# Altium PCB 3043-1-1532.PcbDoc (part 1 of 2)
Units mm, origin at the board's own origin, x right, y up, seen from the top; angles counter-clockwise.
Board outline 82.5 x 82.18 mm, 4 copper layers (Top Layer, Mid-Layer 1, Mid-Layer 2, Bottom Layer); 178 components, 120 nets, 547 pads, 246 vias.
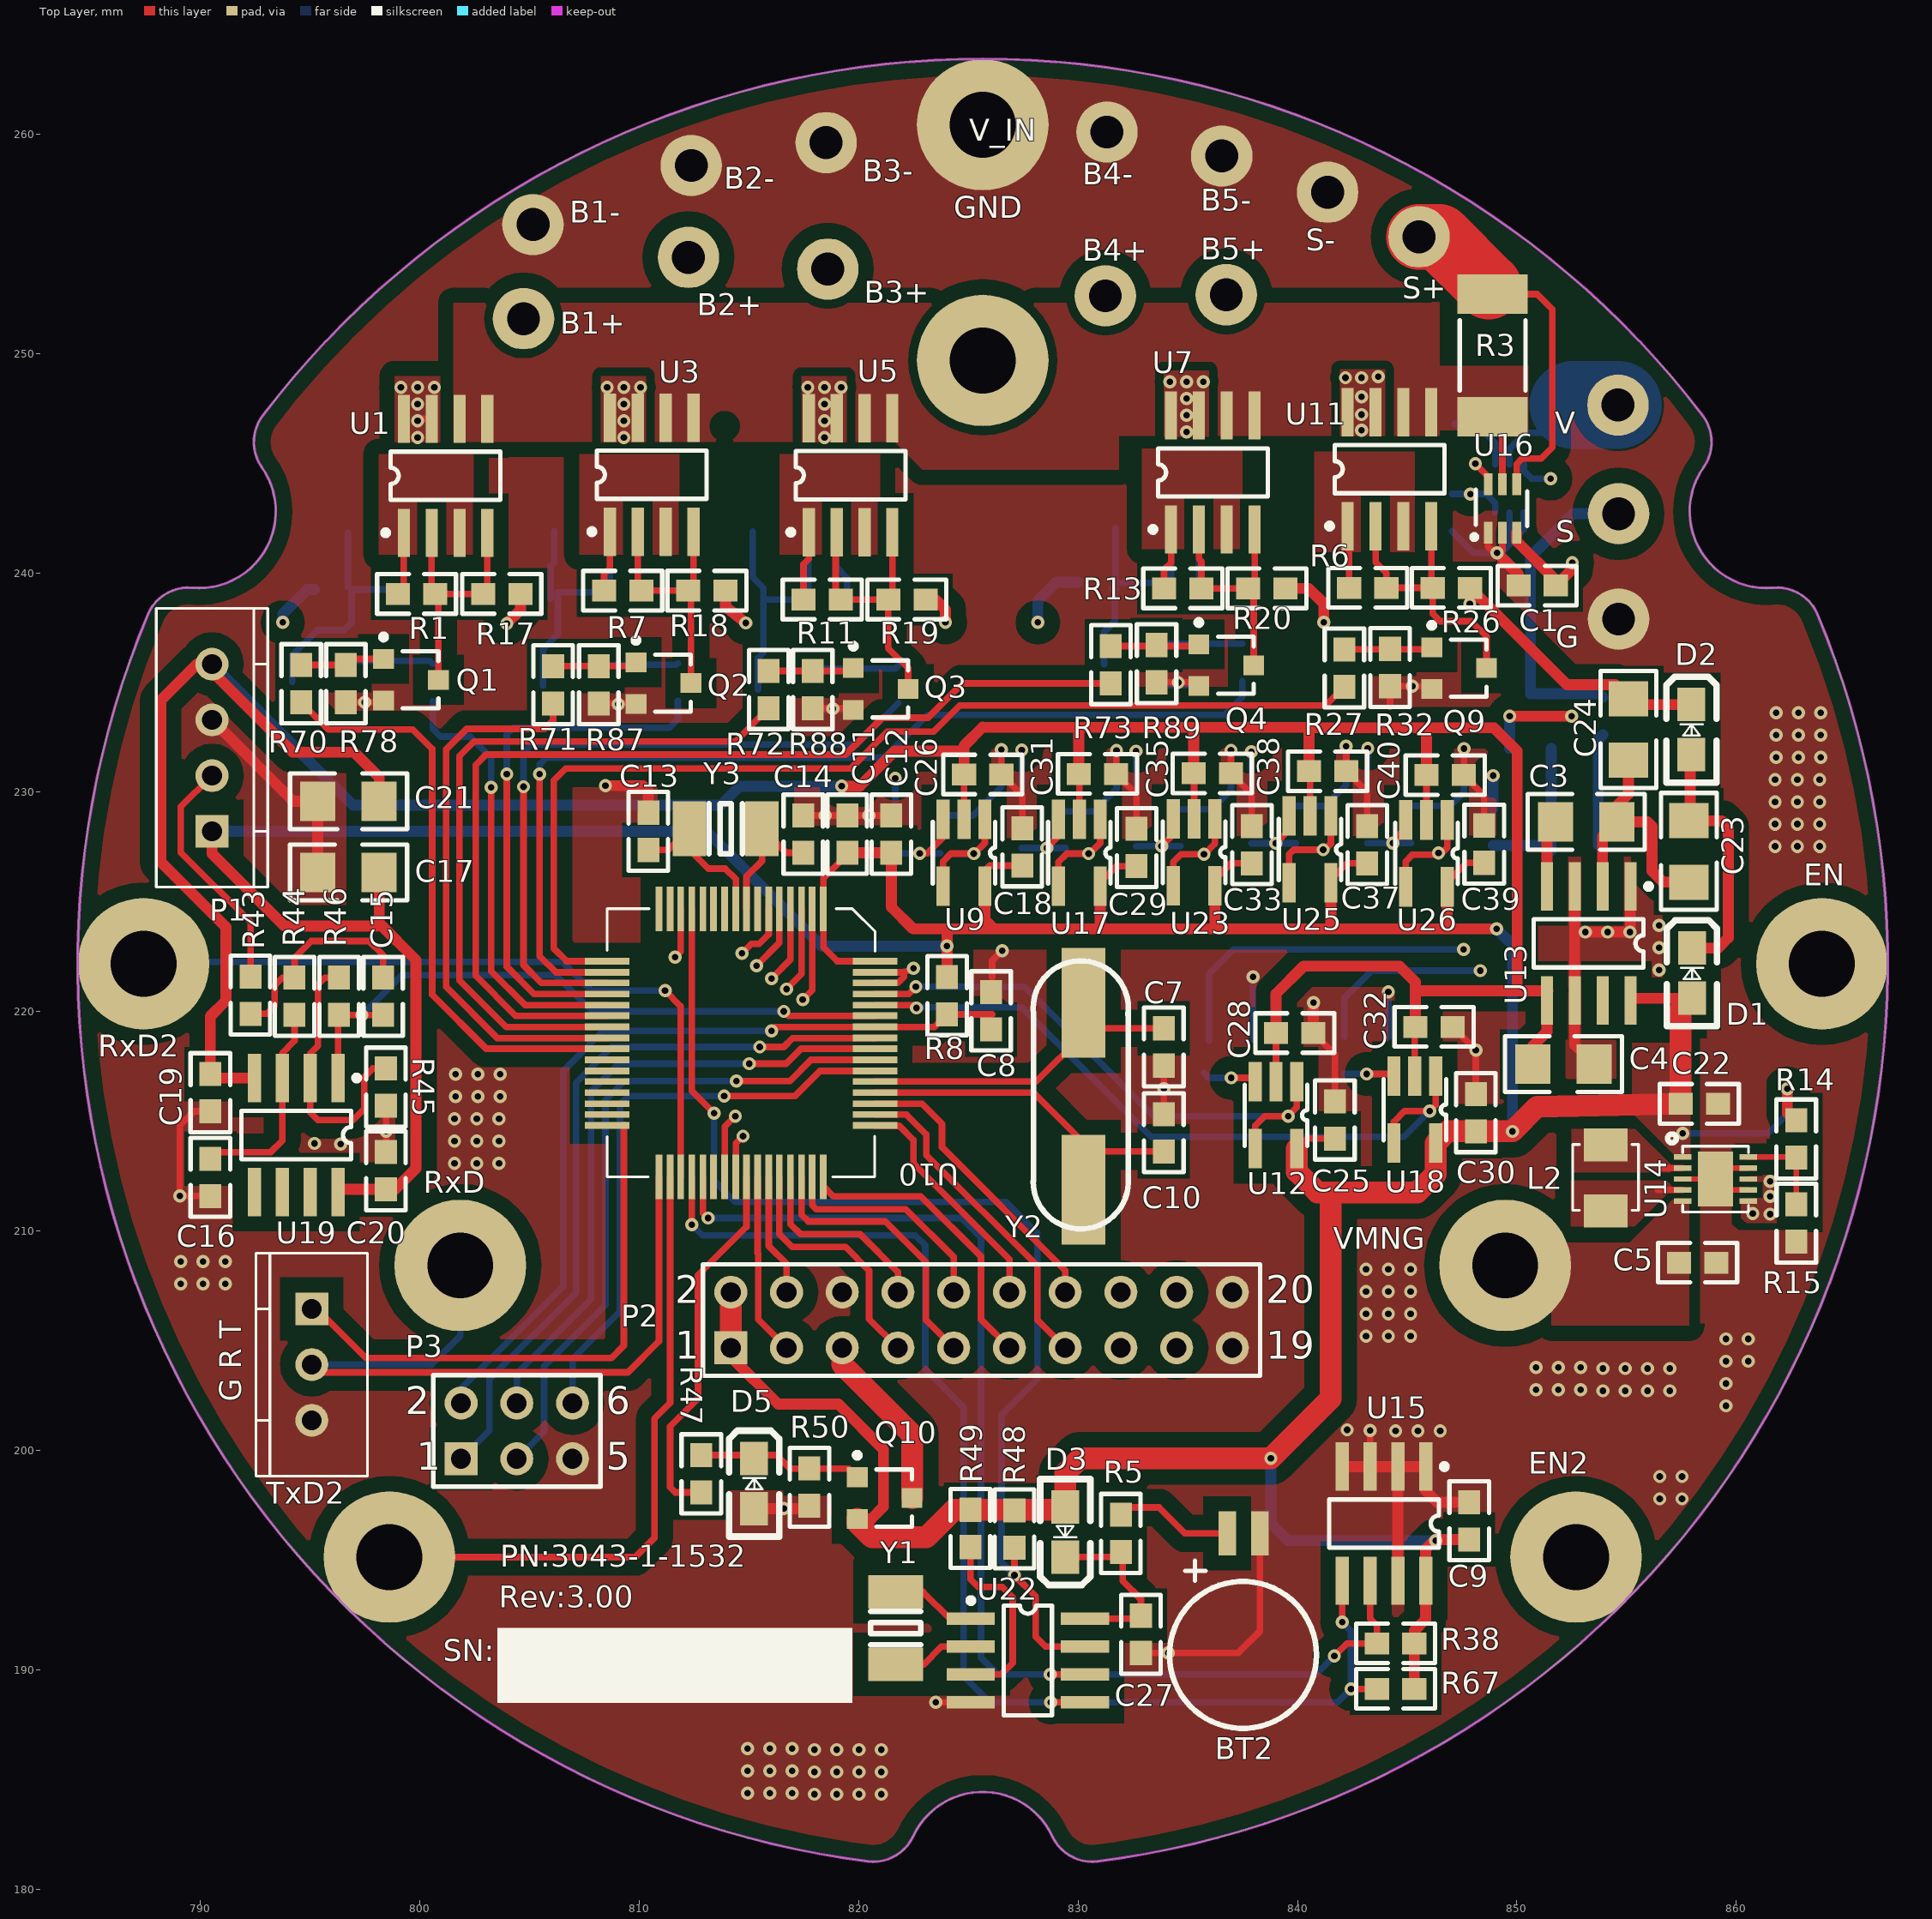
[diagram p0: Top Layer view]
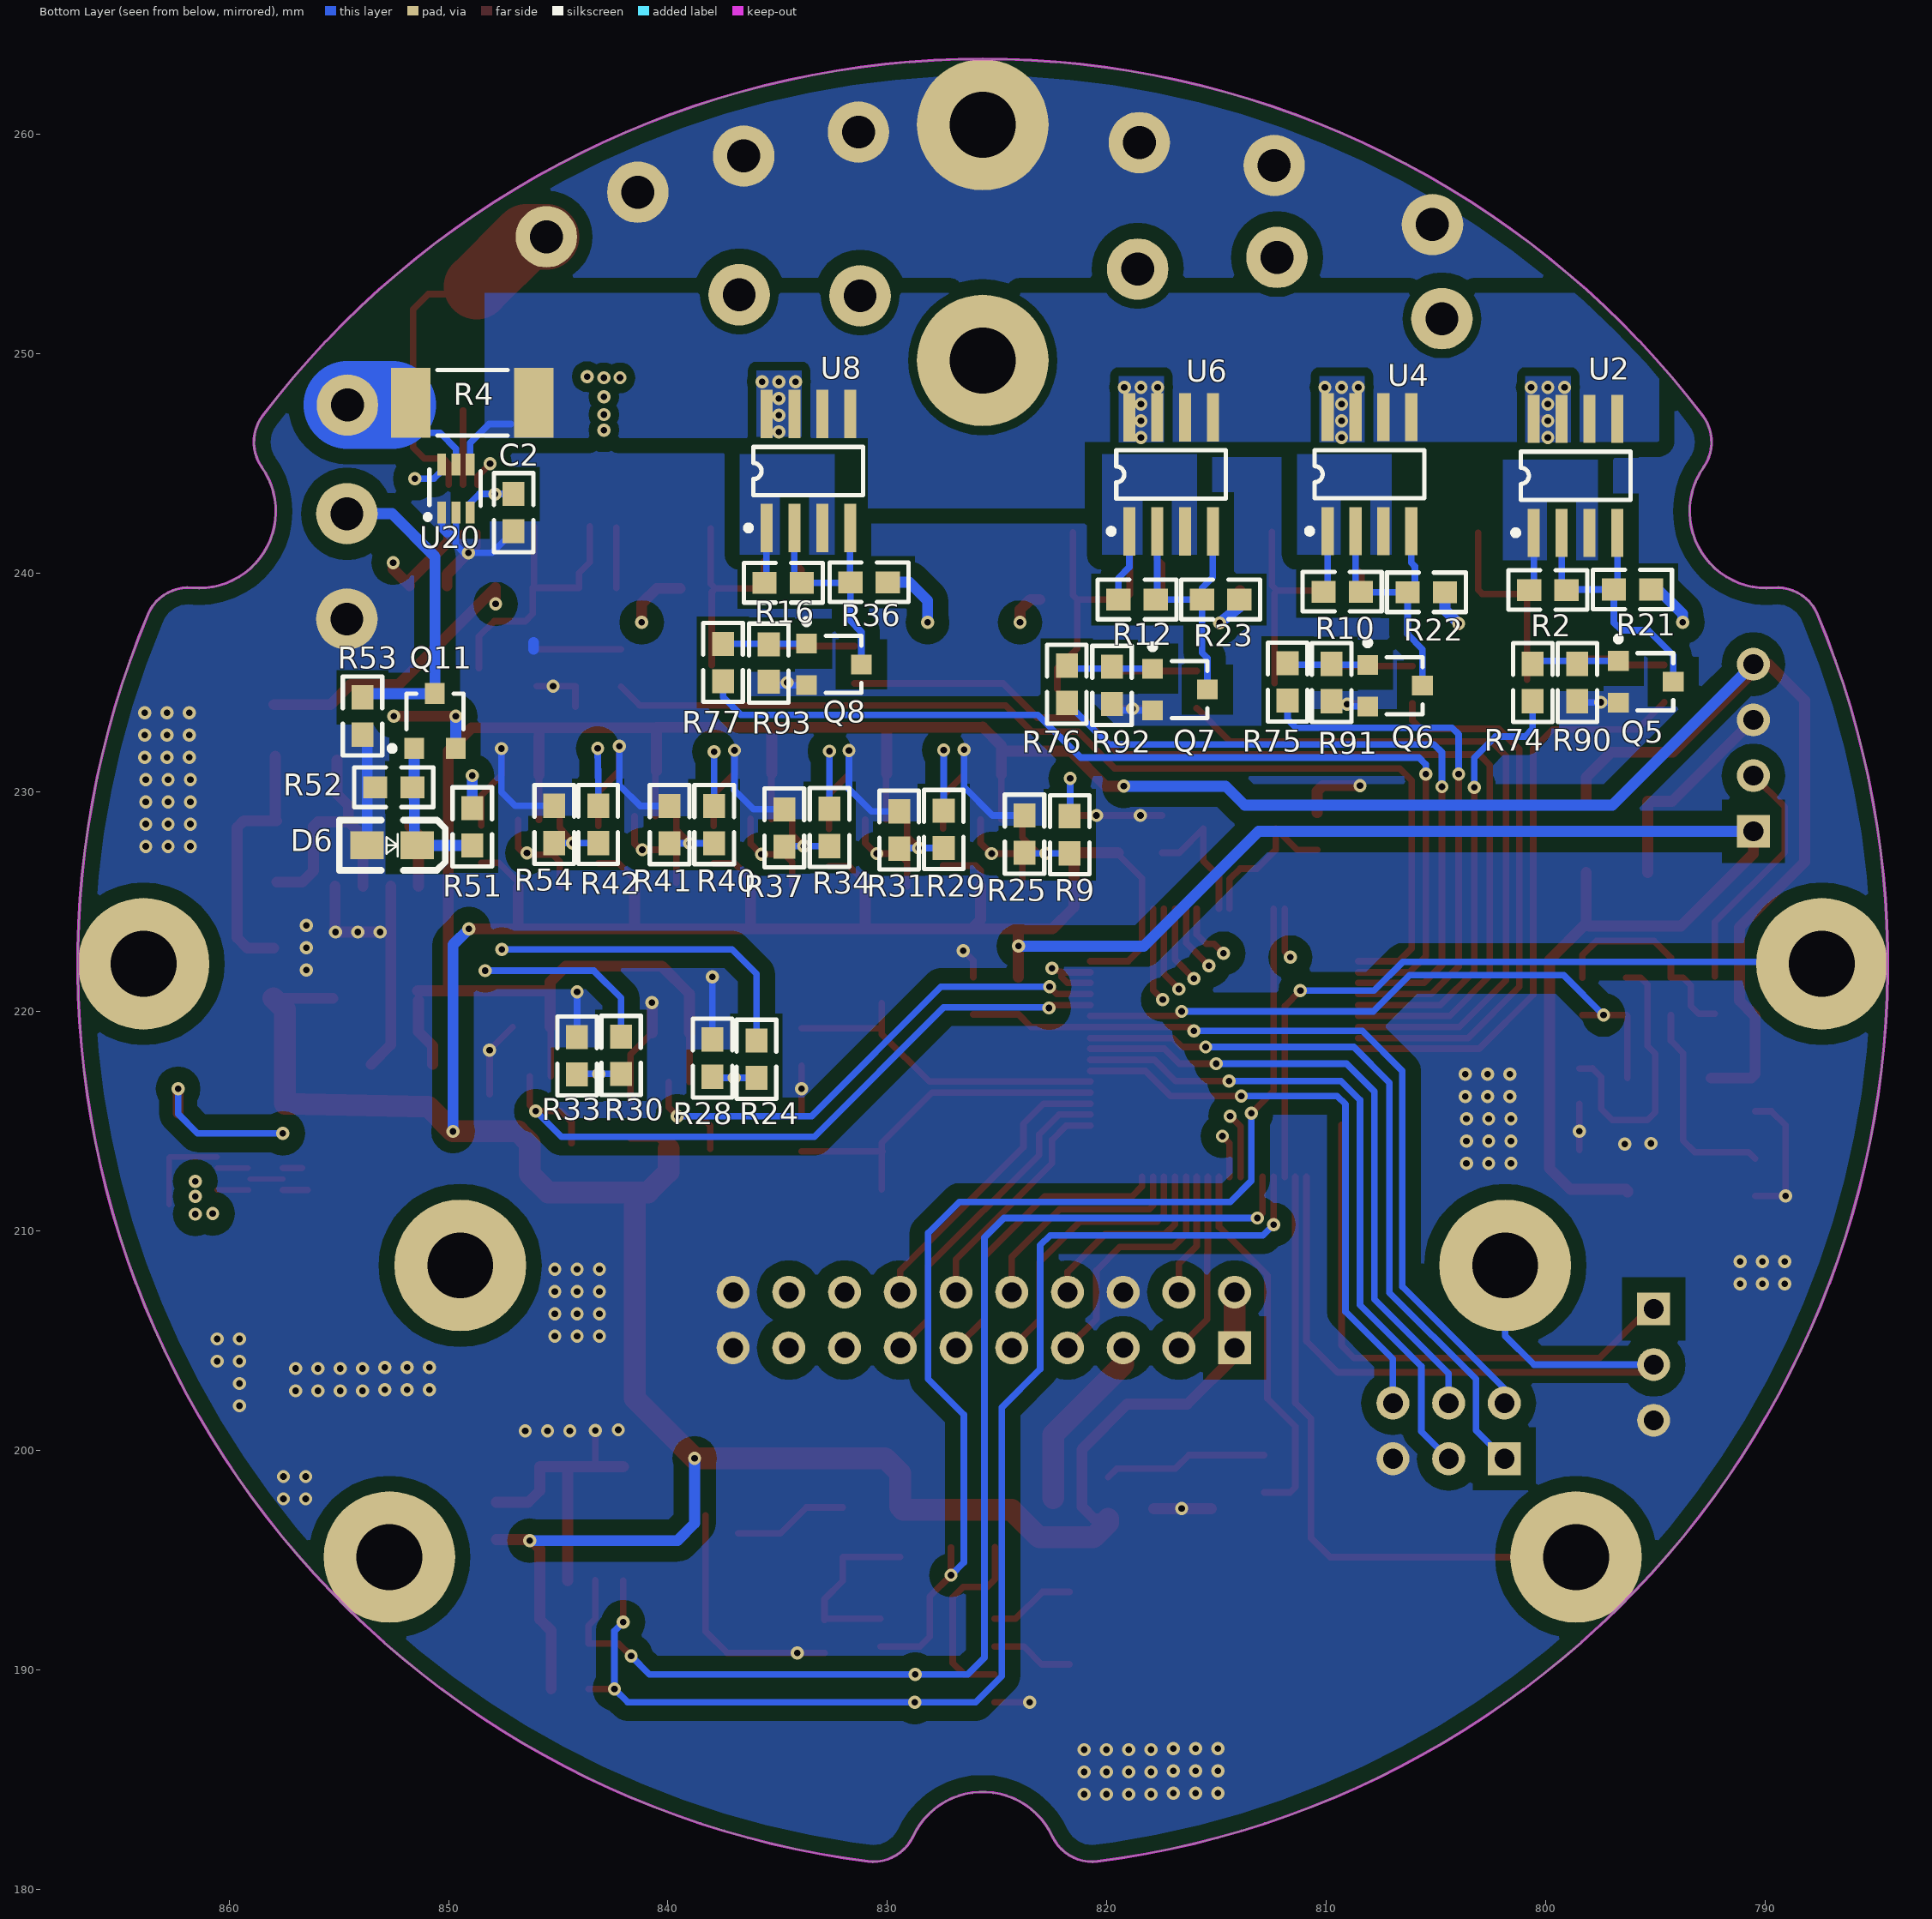
[diagram p1: Bottom Layer view, seen from below]
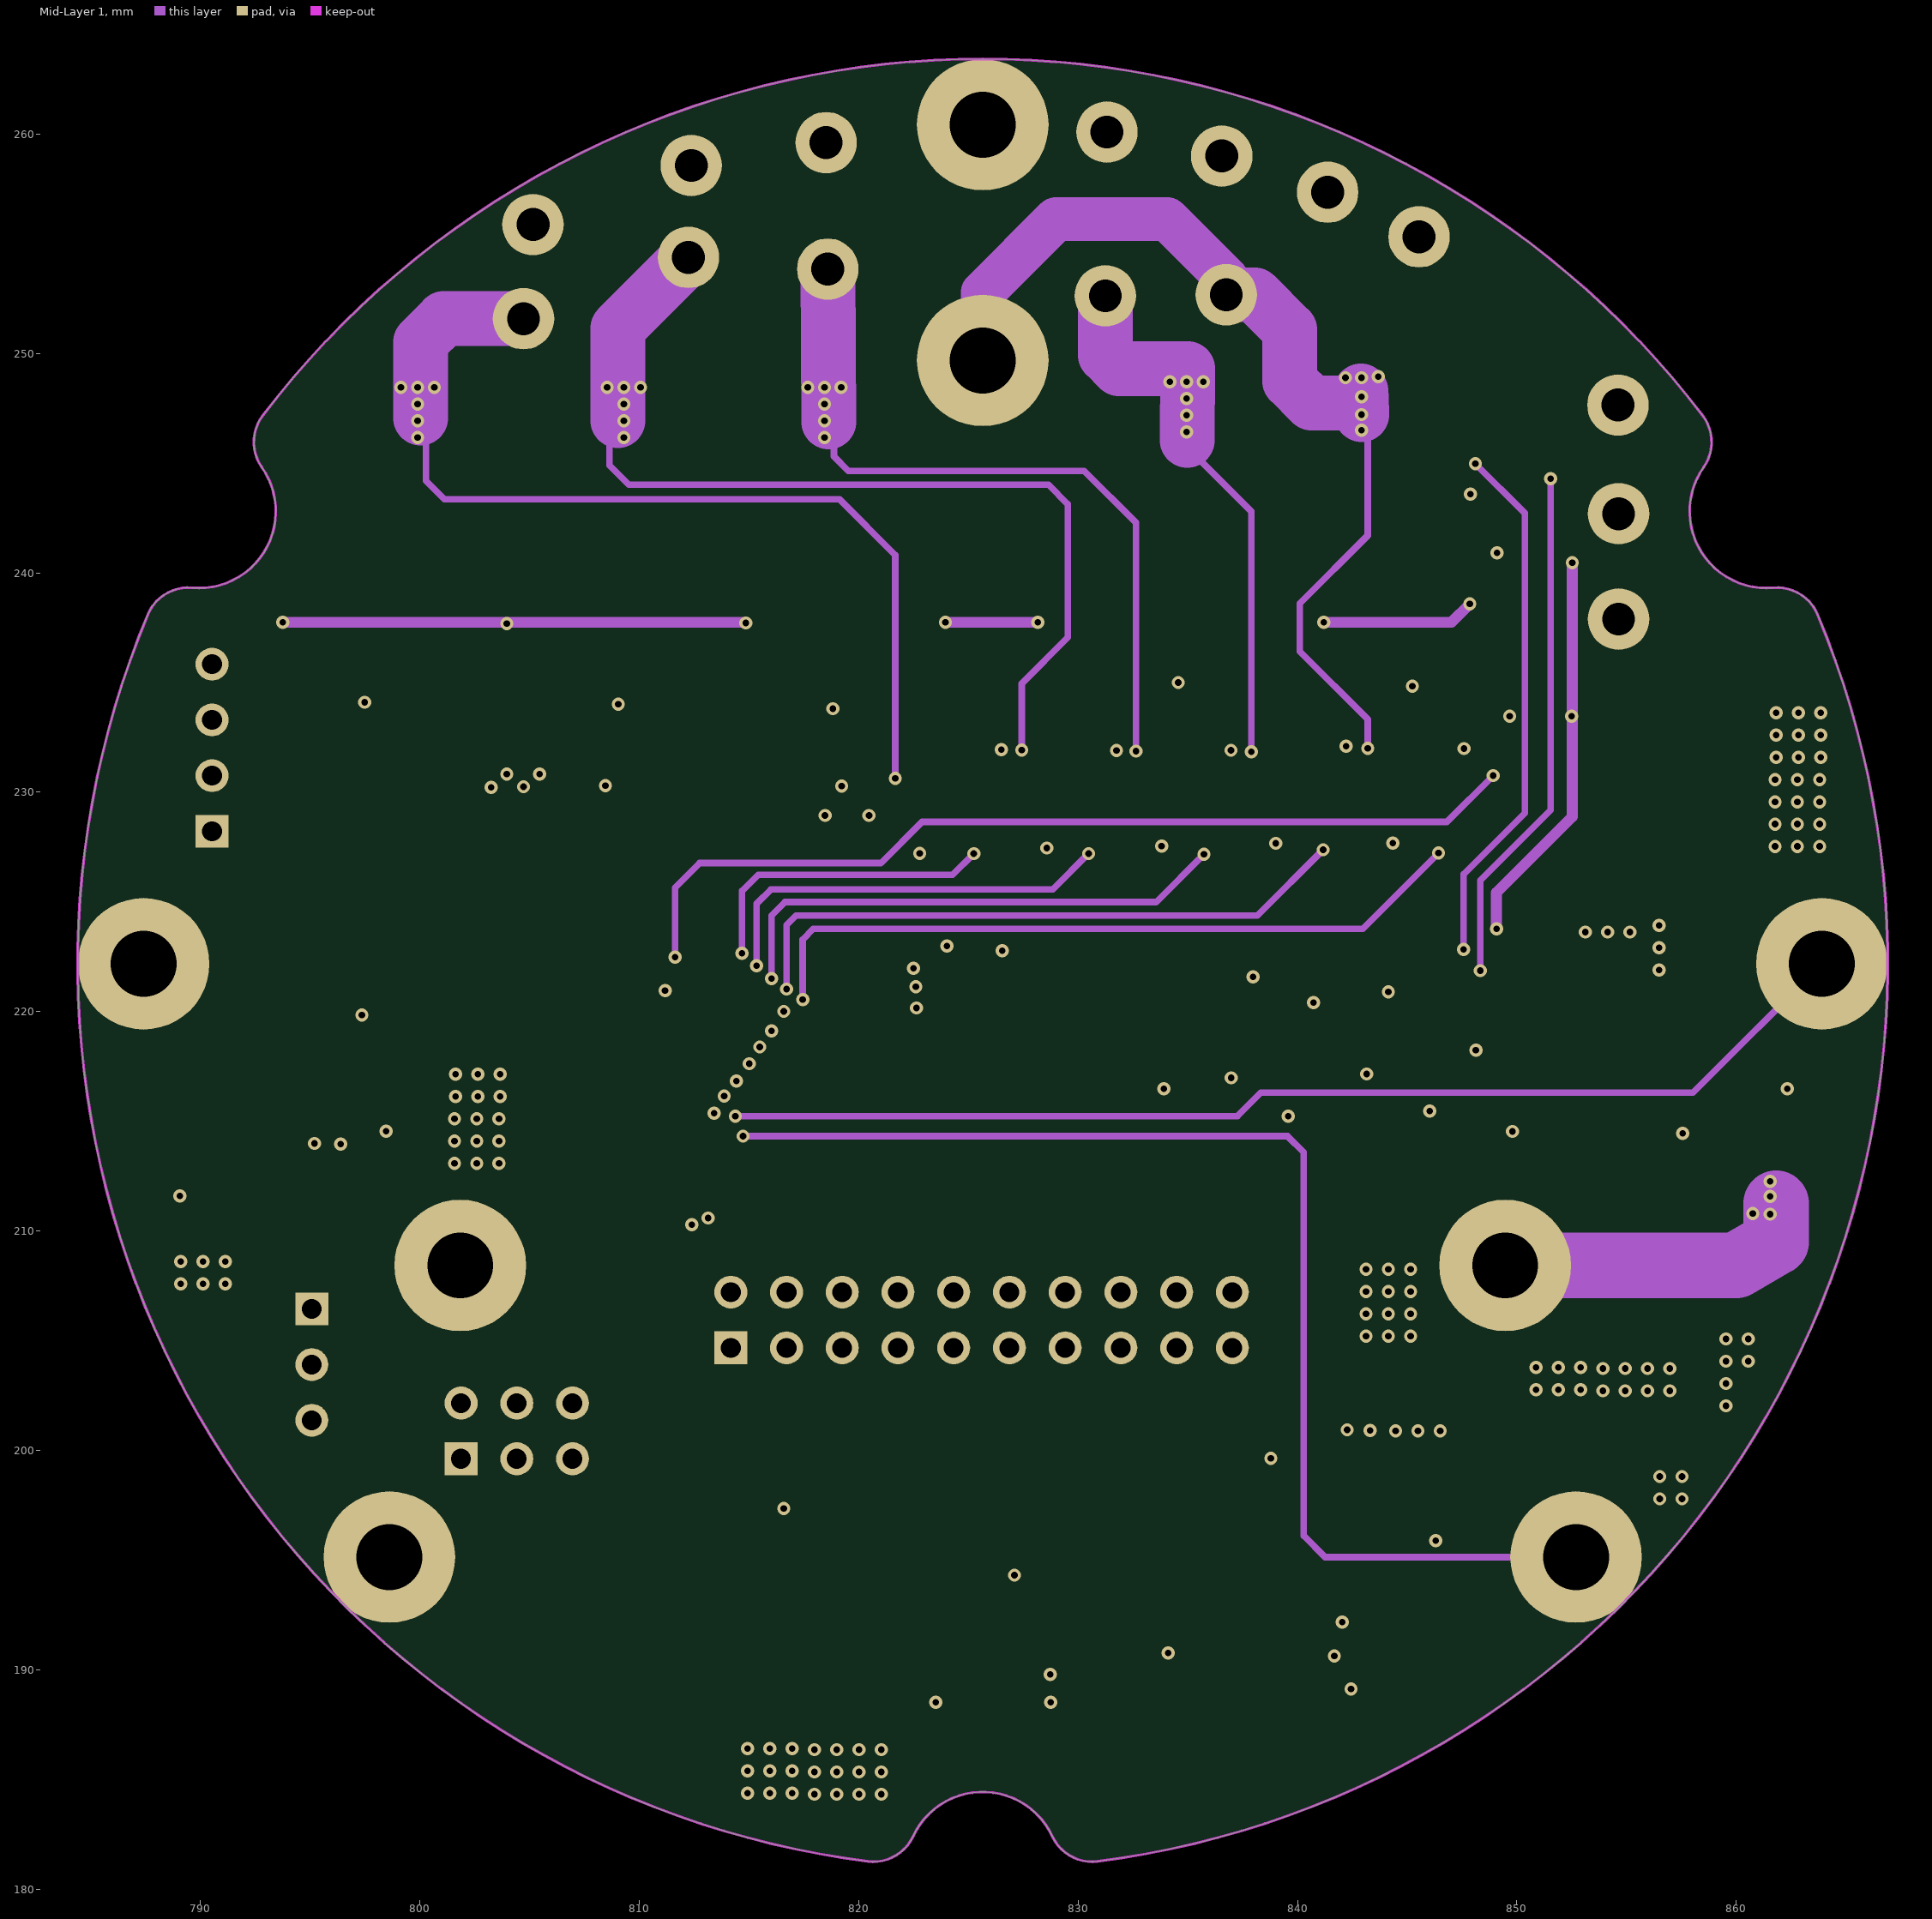
[diagram p2: Mid-Layer 1]
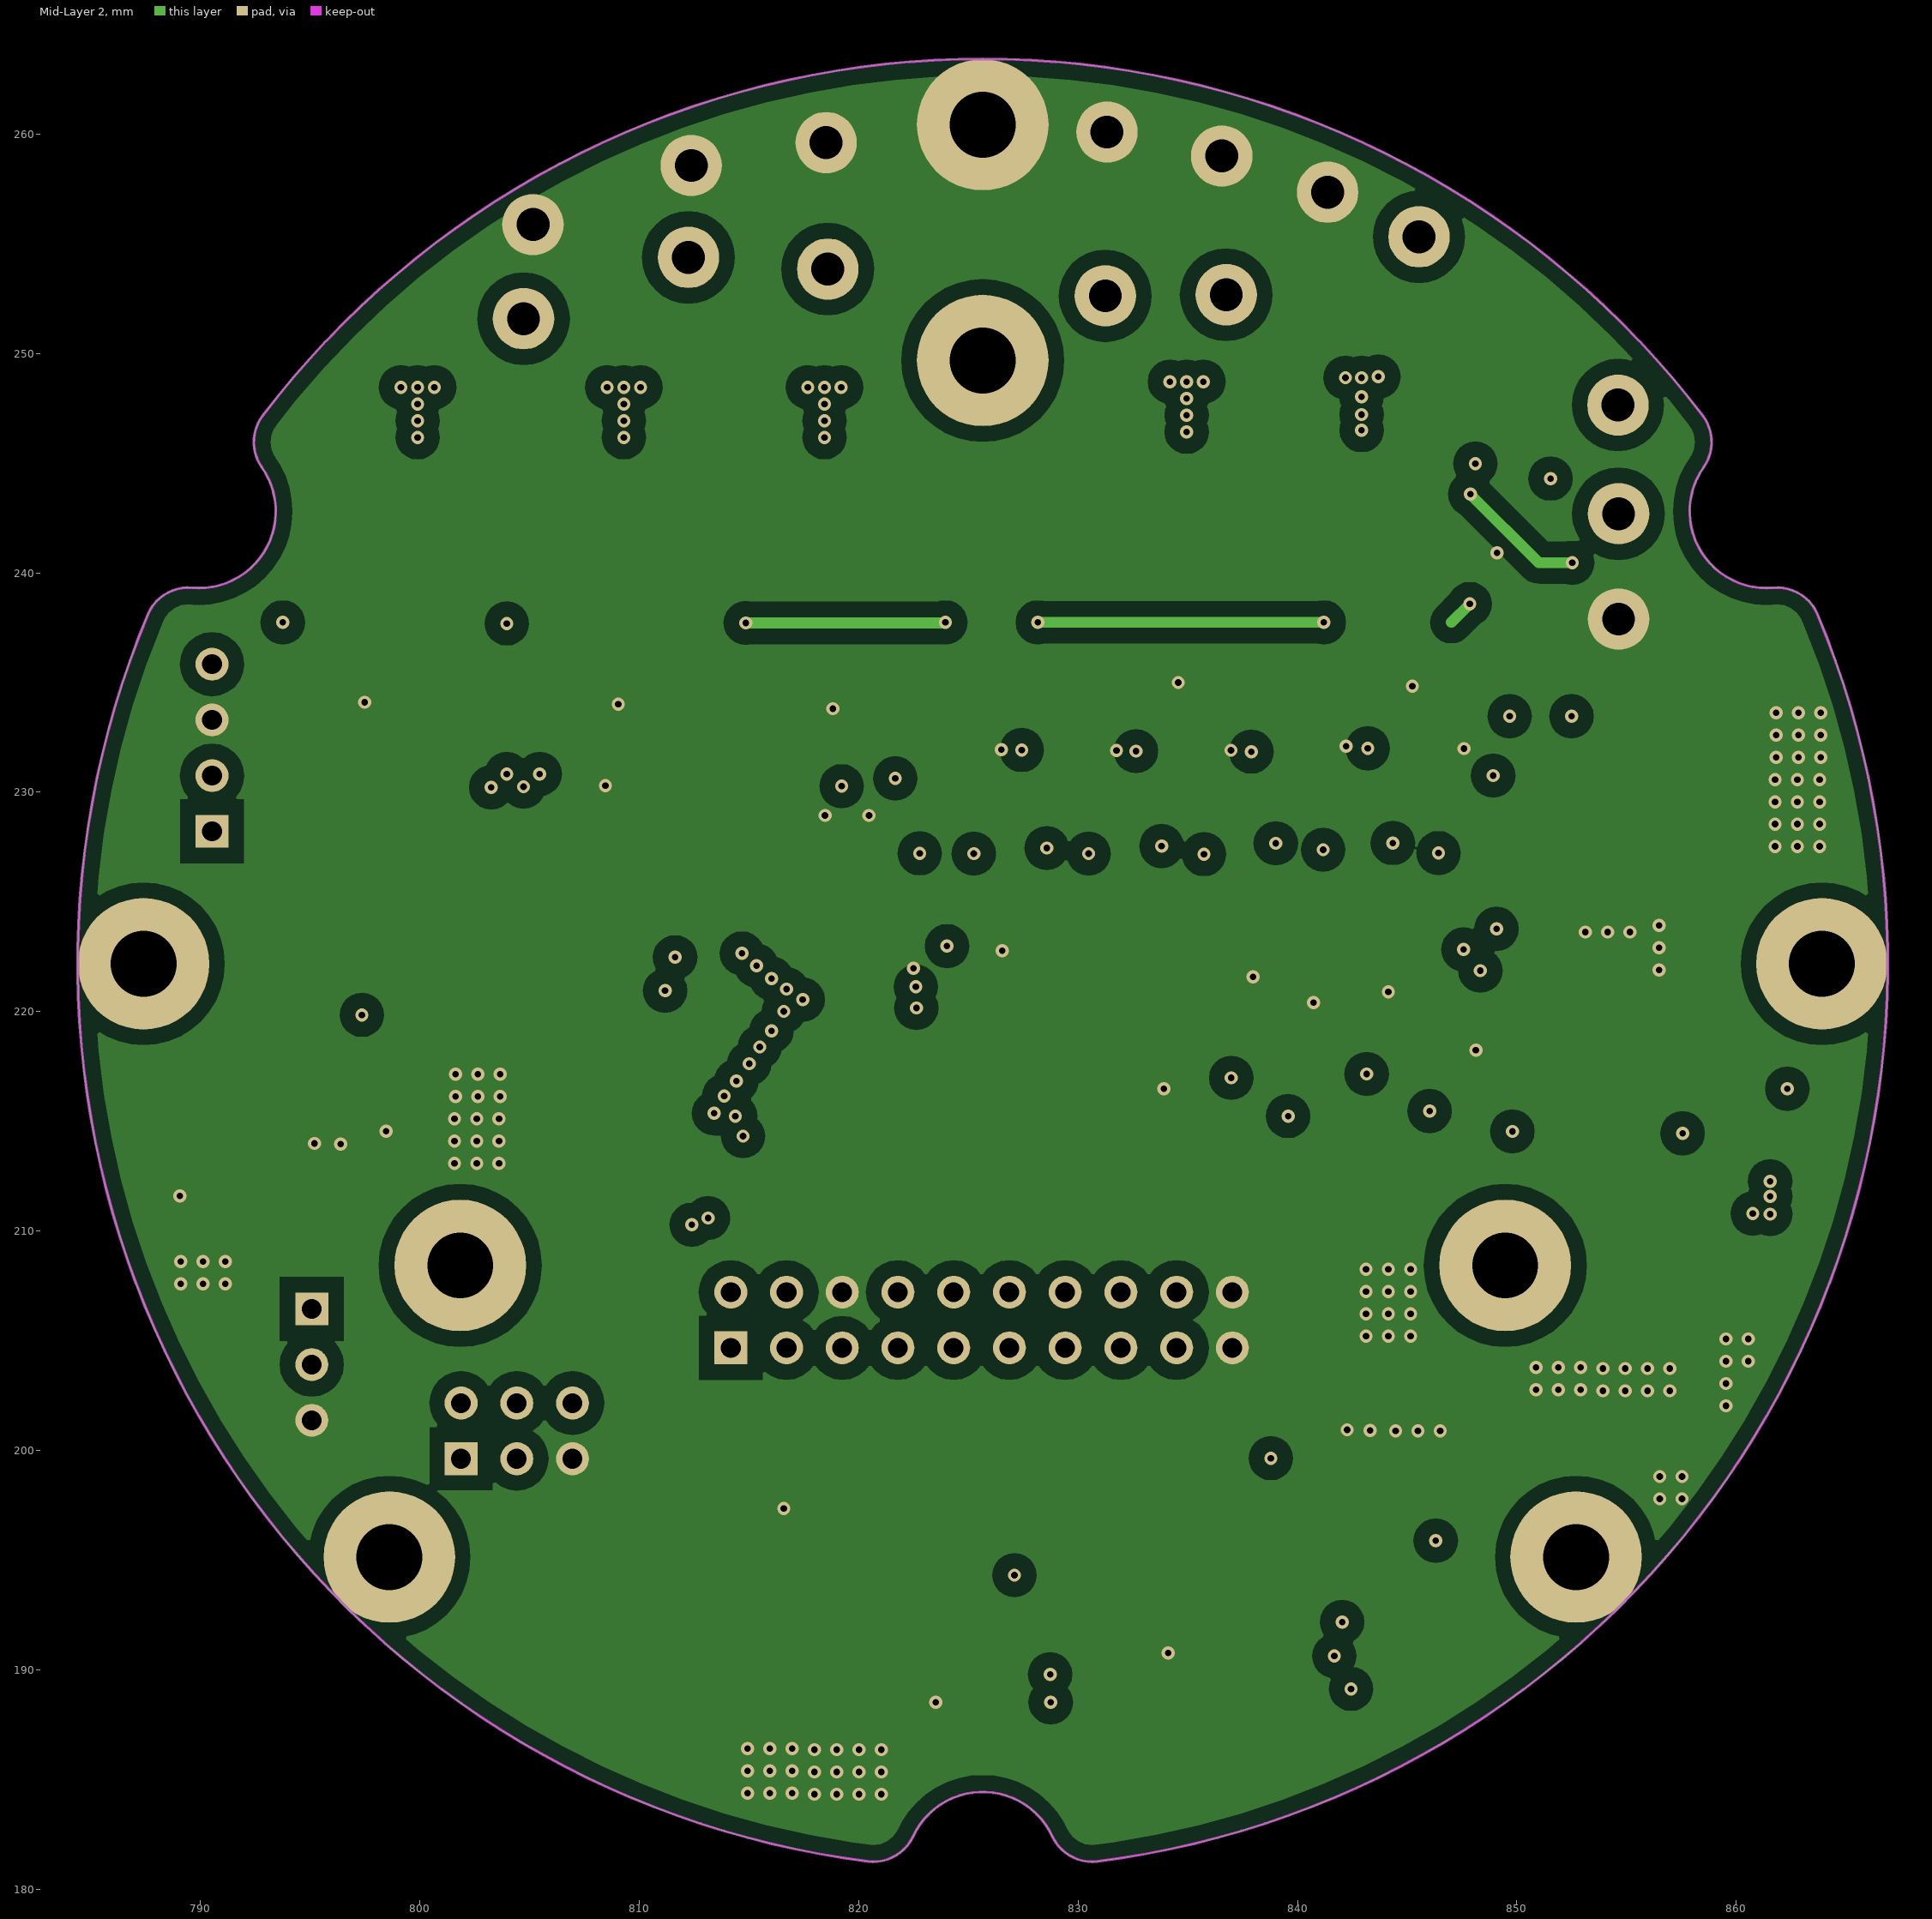
[diagram p3: Mid-Layer 2]

## Layer stack, top to bottom
Top Layer: signal copper 0.0356
Dielectric: dielectric 0.32, FR-4, Dk 4.8
Mid-Layer 1: signal copper 0.0356
Dielectric: dielectric 0.32, FR-4, Dk 4.8
Mid-Layer 2: signal copper 0.0356
Dielectric: dielectric 0.32, FR-4, Dk 4.8
Bottom Layer: signal copper 0.0356

## Board outline
787.598,238.1 cw(c789.443,237.328) 789.62,239.32 ccw(c789.93,242.806) 792.794,244.818 cw(c794.431,245.967) 792.84,247.179 cw(c825.653,222.181) 858.466,247.179 cw(c856.875,245.967) 858.512,244.818 ccw(c861.377,242.806) 861.686,239.32 cw(c861.863,237.328) 863.708,238.1 cw(c825.653,222.181) 830.895,181.266 cw(c830.641,183.25) 828.827,182.407 ccw(c825.653,180.931) 822.479,182.407 cw(c820.666,183.25) 820.411,181.266 cw(c825.653,222.181)

## Design rules (kind name [scope] priority, off if disabled: settings)
Clearance [All] p1: gap=0.07
ComponentClearance [All] p1: gap=0 collisioncheckmode=2
HoleSize [All] p1: absolutevalues=TRUE maxlimit=10 minlimit=0.025 maxpercent=80.000 minpercent=20.000
PolygonConnect [All] p1: connectstyle=Direct reliefconductorwidth=0.254 reliefentries=4 polygonreliefangle="90 Angle"
RoutingLayers [All] p1: top layer_v5=TRUE mid layer 1_v5=FALSE mid layer 2_v5=FALSE bottom layer_v5=TRUE
RoutingVias [All] p1: holewidth=0.711 width=1.27 viastyle="Through Hole" minholewidth=0.711 minwidth=1.27 maxholewidth=0.711 maxwidth=1.27
SolderMaskExpansion [All] p1: expansion=0.102
TestPointUsage [All] p1: valid=0 allowmultiple=FALSE
Testpoint [All] p1: side=15 testpointundercomponent=TRUE minsize=1.016 maxsize=2.54 preferedsize=1.524 minholesize=0 maxholesize=1.016 preferedholesize=0.813 testpointgrid=0.025 style=1023 order=1234567890
Width [All] p1: maxlimit=10 minlimit=0.1 preferedwidth=0.254 toplayer_prefwidth=0.3 midlayer1_prefwidth=0.3 midlayer2_prefwidth=0.5 bottomlayer_prefwidth=0.5 minimp=50.000000 maximp=50.000000 favimp=50.000000
15 further rules are at their usual default settings.

## Classes and differential pairs
component class U_6-E2p&RTC: BT2 C9 C27 D3 DS3 L1 L3 P5 R5 R38 R48 R49 R67 TP4 TP5 U15 U22 Y1
component class U_2-PWR_MANAGE: B1+ B1- B2+ B2- B3+ B3- B4+ B4- B5+ B5- C1 C2 GND Q1 Q2 Q3 Q4 Q5 Q6 Q7 Q8 Q9 R1 R2 R3 R4 R6 R7 R10 R11 R12 R13 R16 R17 R18 R19 R20 R21 R22 R23 R26 R27 R32 R36 R70 R71 R72 R73 R74 R75 R76 R77 R78 R87 R88 R89 R90 R91 R92 R93 S+ S- SEN U1 U2 U3 U4 U5 U6 U7 U8 U11 U16 U20 V_IN
component class U_5-PWR_ADC: C15 C16 C17 C18 C19 C20 C21 C25 C26 C28 C29 C30 C31 C32 C33 C35 C37 C38 C39 C40 JP13 MARK1 MARK2 NET P1 P4 PWR R9 R24 R25 R28 R29 R30 R31 R33 R34 R37 R40 R41 R42 R43 R44 R45 R46 R54 Ref1 U9 U12 U17 U18 U19 U23 U25 U26 VR1 VR2
component class U_4-PWR_MANAGE_3: BT3 BT4 BT5 BT6 BT7 BT8 C7 C8 C10 C11 C12 C13 C14 CN1 CN2 CP1 CP2 CP3 CP4 CP5 CP6 CP7 CP8 D5 D6 DBG EN EN2 G "G R T" GND JP2 JP3 P2 P3 Q10 Q11 R8 R47 R50 R51 R52 R53 RA3 RA4 RxD2 S S1 S2 S3 S4 S5 S6 S7 S8 TP3 TP7 TP13 TP14 TP15 TP16 TP17 TP18 TxD2 u7 U10 U29 U30 U31 U57 U58 U59 U60 U61 U62 V Y2 Y3
component class U_3-PWR_BAK_BATT: 5V -5V BAT C3 C4 C5 C22 C23 C24 D1 D2 J1 J2 J3 J4 L2 NC R14 R15 R94 R95 R96 R97 R98 R99 R100 R101 R102 TP11 U13 U14 U32 U63 U64 U65 U66 U67 U68 U69 VIN VMNG VOUT

## Components (designator, comment, footprint, x,y, rotation, side; value= is the part's Value field where it differs from the comment)
B1+ "ND" END_1.5_2.8#1 804.723,251.587 r0 top
B1- "ND" END_1.5_2.8#1 805.155,255.88 r0 top
B2+ "ND" END_1.5_2.8#1 812.241,254.381 r0 top
B2- "ND" END_1.5_2.8#1 812.368,258.572 r0 top
B3+ "ND" END_1.5_2.8#1 818.591,253.848 r0 top
B3- "ND" END_1.5_2.8#1 818.515,259.613 r0 top
B4+ "ND" END_1.5_2.8#1 831.24,252.628 r0 top
B4- "ND" END_1.5_2.8#1 831.317,260.096 r0 top
B5+ "ND" END_1.5_2.8#1 836.752,252.679 r0 top
B5- "ND" END_1.5_2.8#1 836.549,259.004 r0 top
BT2 "MS621FE" BATT_BAK 837.463,190.068 r90 top
C1 "100nF_20%_0603" C1608-0603 850.925,239.42 r0 top
C2 "100nF_20%_0603" C1608-0603 847.039,242.748 r90 bottom
C3 "10uF_20%_1206" CC3216-1206 854.304,228.651 r0 top
C4 "10uF_20%_1206" CC3216-1206 853.262,217.602 r0 top
C5 "10uF_20%_0603" C1608-0603 858.239,208.558 r0 top
C7 "100nF_20%_0603" C1608-0603 833.907,218.389 r90 top
C8 "100nF_20%_0603" C1608-0603 826.033,220.04 r90 top
C9 "100nF_20%_0603" C1608-0603 847.827,196.79 r90 top
C10 "100nF_20%_0603" C1608-0603 833.907,214.478 r270 top
C11 "100nF_20%_0603" C1608-0603 819.48,228.092 r90 top
C12 "100nF_20%_0603" C1608-0603 821.487,228.092 r90 top
C13 "100nF_20%_0603" C1608-0603 810.412,228.219 r270 top
C14 "100nF_20%_0603" C1608-0603 817.474,228.092 r270 top
C15 "39nF_20%_0603" C1608-0603 798.322,220.701 r270 top
C16 "39nF_20%_0603" C1608-0603 790.448,212.446 r270 top
C17 "10uF_20%_1210" CC3216-1206 795.604,226.339 r180 top
C18 "100nF_20%_0603" C1608-0603 827.456,227.508 r90 top
C19 "100nF_20%_0603" C1608-0603 790.448,216.306 r270 top
C20 "100nF_20%_0603" C1608-0603 798.449,212.75 r90 top
C21 "10uF_20%_1210" CC3216-1206 795.604,229.591 r180 top
C22 "4.7uF_20%_0603" C1608-0603 858.317,215.798 r0 top
C23 "10uF_20%_1206" CC3216-1206 857.834,226.162 r270 top
C24 "10uF_20%_1206" CC3216-1206 855.091,231.724 r270 top
C25 "100nF_20%_0603" C1608-0603 841.705,215.062 r90 top
C26 "100nF_20%_0603" C1608-0603 825.652,230.81 r0 top
C27 "Cap2" C1608-0603 832.866,191.618 r270 top
C28 "100nF_20%_0603" C1608-0603 839.876,219.024 r0 top
C29 "100nF_20%_0603" C1608-0603 832.663,227.482 r90 top
C30 "100nF_20%_0603" C1608-0603 848.131,215.392 r90 top
C31 "100nF_20%_0603" C1608-0603 830.885,230.835 r0 top
C32 "100nF_20%_0603" C1608-0603 846.226,219.304 r0 top
C33 "100nF_20%_0603" C1608-0603 837.921,227.609 r90 top
C35 "100nF_20%_0603" C1608-0603 836.117,230.861 r0 top
C37 "100nF_20%_0603" C1608-0603 843.178,227.609 r90 top
C38 "100nF_20%_0603" C1608-0603 841.375,230.962 r0 top
C39 "100nF_20%_0603" C1608-0603 848.512,227.635 r90 top
C40 "100nF_20%_0603" C1608-0603 846.734,230.784 r0 top
D1 "1N4148" LED0805 857.987,221.869 r270 top
D2 "1N4148" LED0805 857.961,232.969 r270 top
D3 "1N4148" LED0805 829.412,196.164 r90 top
D5 "5.1V" LED0805 815.238,198.605 r270 top
D6 "5.1V" LED0805 852.449,227.584 r0 bottom
EN "ND" END_3_6#1 872.312,222.377 r0 top
EN2 "ND" END_3_6#2 860.704,191.16 r0 top
G "ND" END_1.5_2.8#1 854.634,237.896 r90 top
"G R T" "Header 3" XH-03H 795.071,206.451 r270 top (schematic designator "T R G")
GND "ND" END_1.5_2.8#2 825.703,271.323 r0 top
L2 "Inductor" L3x3x1.5_5A 852.55,210.92 r90 top
P1 "Header 4" XH-04H 790.524,228.219 r90 top
P2 "Header 10X2" HDR2X10 814.172,204.673 r0 top locked
P3 "Header 3X2" HDR2X3 801.878,199.619 r0 top
Q1 "MOSFET-N" SO-G3/C2.5 800.506,235.077 r270 top
Q2 "MOSFET-N" SO-G3/C2.5 812.013,234.925 r270 top
Q3 "MOSFET-N" SO-G3/C2.5 821.919,234.657 r270 top
Q4 "MOSFET-N" SO-G3/C2.5 837.667,235.737 r270 top
Q5 "MOSFET-N" SO-G3/C2.5 794.512,234.988 r270 bottom
Q6 "MOSFET-N" SO-G3/C2.5 805.942,234.81 r270 bottom
Q7 "MOSFET-N" SO-G3/C2.5 815.746,234.633 r270 bottom
Q8 "MOSFET-N" SO-G3/C2.5 831.52,235.776 r270 bottom
Q9 "MOSFET-N" SO-G3/C2.5 848.284,235.61 r270 top
Q10 "MOSFET-P_SI3401_2301" SO-G3/C2.5 822.096,197.777 r270 top
Q11 "MOSFET-P_SI3401_2301" SO-G3/C2.5 850.57,234.163 r180 bottom
R1 "50K_1%_0603" C1608-0603 799.846,239.039 r0 top
R2 "50K_1%_0603" C1608-0603 799.897,239.217 r0 bottom
R3 "25mR_1%_3225" CR6332-2512 848.893,249.911 r270 top
R4 "25mR_1%_3225" CR6332-2512 848.919,247.752 r180 bottom
R5 "100R_5%_0603" C1608-0603 831.952,196.215 r90 top
R6 "50K_1%_0603" C1608-0603 843.204,239.319 r180 top
R7 "50K_1%_0603" C1608-0603 809.244,239.192 r180 top
R8 "10K_5%_0603" C1608-0603 824.027,220.726 r90 top
R9 "1K_5%_0603" C1608-0603 821.69,228.067 r270 bottom
R10 "50K_1%_0603" C1608-0603 809.269,239.141 r0 bottom
R11 "50K_1%_0603" C1608-0603 818.337,238.785 r180 top
R12 "50K_1%_0603" C1608-0603 818.617,238.785 r0 bottom
R13 "50K_1%_0603" C1608-0603 834.771,239.293 r180 top
R14 "10K_1%_0603" C1608-0603 862.735,214.197 r270 top
R15 "3.3K_1%_0603" C1608-0603 862.736,210.363 r270 top
R16 "50K_1%_0603" C1608-0603 834.746,239.547 r0 bottom
R17 "4.7K_1%_0603" C1608-0603 803.732,239.039 r0 top
R18 "4.7K_1%_0603" C1608-0603 813.079,239.192 r0 top
R19 "4.7K_1%_0603" C1608-0603 822.198,238.785 r0 top
R20 "4.7K_1%_0603" C1608-0603 838.606,239.293 r0 top
R21 "4.7K_1%_0603" C1608-0603 796.036,239.243 r180 bottom
R22 "4.7K_1%_0603" C1608-0603 805.434,239.116 r180 bottom
R23 "4.7K_1%_0603" C1608-0603 814.807,238.785 r180 bottom
R24 "1K_5%_0603" C1608-0603 835.965,217.83 r270 bottom
R25 "1K_5%_0603" C1608-0603 823.747,228.092 r270 bottom
R26 "4.7K_1%_0603" C1608-0603 847.014,239.319 r0 top
R27 "1K_1%_0603" C1608-0603 842.137,235.661 r270 top
R28 "1K_5%_0603" C1608-0603 837.971,217.881 r270 bottom
R29 "1K_5%_0603" C1608-0603 827.43,228.307 r270 bottom
R30 "1K_5%_0603" C1608-0603 842.137,218.008 r270 bottom
R31 "1K_5%_0603" C1608-0603 829.462,228.282 r270 bottom
R32 "50K_1%_0603" C1608-0603 844.22,235.687 r270 top
R33 "1K_5%_0603" C1608-0603 844.144,217.983 r270 bottom
R34 "1K_5%_0603" C1608-0603 832.637,228.397 r270 bottom
R36 "4.7K_1%_0603" C1608-0603 830.834,239.573 r180 bottom
R37 "1K_5%_0603" C1608-0603 834.695,228.371 r270 bottom
R38 "10K_5%_0603" C1608-0603 844.474,191.202 r0 top
R40 "1K_5%_0603" C1608-0603 837.895,228.524 r270 bottom
R41 "1K_5%_0603" C1608-0603 839.927,228.524 r270 bottom
R42 "1K_5%_0603" C1608-0603 843.178,228.536 r270 bottom
R43 "1K_5%_0603" C1608-0603 792.277,220.751 r270 top
R44 "1K_5%_0603" C1608-0603 794.283,220.701 r270 top
R45 "1K_5%_0603" C1608-0603 798.449,216.56 r90 top
R46 "1K_5%_0603" C1608-0603 796.315,220.701 r270 top
R47 "50R_5%_0603" C1608-0603 812.825,198.933 r90 top
R48 "10K_5%_0603" C1608-0603 827.1,196.418 r270 top
R49 "10K_5%_0603" C1608-0603 825.094,196.444 r270 top
R50 "50K_1%_0603" C1608-0603 817.753,198.323 r90 top
R51 "50R_5%_0603" C1608-0603 848.919,228.422 r90 bottom
R52 "50K_1%_0603" C1608-0603 852.5,230.226 r180 bottom
R53 "50K_5%_0603" C1608-0603 853.923,233.477 r270 bottom
R54 "1K_5%_0603" C1608-0603 845.185,228.536 r270 bottom
R67 "10K_5%_0603" C1608-0603 844.474,189.128 r0 top
R70 "1K_1%_0603" C1608-0603 794.588,234.95 r270 top
R71 "1K_1%_0603" C1608-0603 806.069,234.899 r270 top
R72 "1K_1%_0603" C1608-0603 815.899,234.682 r270 top
R73 "1K_1%_0603" C1608-0603 831.494,235.814 r270 top
R74 "1K_1%_0603" C1608-0603 800.583,235.001 r270 bottom
R75 "1K_1%_0603" C1608-0603 811.759,235.026 r270 bottom
R76 "1K_1%_0603" C1608-0603 821.817,234.925 r270 bottom
R77 "1K_1%_0603" C1608-0603 837.489,235.915 r270 bottom
R78 "50K_1%_0603" C1608-0603 796.62,234.95 r270 top
R87 "50K_1%_0603" C1608-0603 808.152,234.899 r270 top
R88 "50K_1%_0603" C1608-0603 817.905,234.682 r270 top
R89 "50K_1%_0603" C1608-0603 833.577,235.864 r270 top
R90 "50K_1%_0603" C1608-0603 798.551,235.001 r270 bottom
R91 "50K_1%_0603" C1608-0603 809.752,235.001 r270 bottom
R92 "50K_1%_0603" C1608-0603 819.76,234.874 r270 bottom
R93 "50K_1%_0603" C1608-0603 835.406,235.89 r270 bottom
RxD "ND" END_3_6#3 803.173,214.782 r0 top
RxD2 "ND" END_3_6#4 788.06,224.282 r0 top (schematic designator RxD)
S "ND" END_1.5_2.8#1 854.634,242.697 r90 top
S+ "ND" END_1.5_2.8#1 845.541,255.321 r0 top
S- "ND" END_1.5_2.8#1 841.375,257.353 r0 top
TxD2 "ND" END_3_6#5 798.449,194.564 r0 top (schematic designator TxD)
U1 "SI4953DY" SO-8 801.167,244.424 r0 top
U2 "SI4953DY" SO-8 798.627,244.424 r180 bottom
U3 "SI4953DY" SO-8 810.565,244.475 r0 top
U4 "SI4953DY" SO-8 808.025,244.5 r180 bottom
U5 "SI4953DY" SO-8 819.633,244.45 r0 top
U6 "SI4953DY" SO-8 817.067,244.491 r180 bottom
U7 "SI4953DY" SO-8 836.143,244.577 r0 top
U8 "SI4953DY" SO-8 833.603,244.643 r180 bottom
U9 "LM321" SOT23-5 823.595,227.101 r270 top
U10 "MSP430F149/249/449" QFP-64 820.725,212.446 r180 top
U11 "SI4953DY" SO-8 844.194,244.729 r0 top
U12 "LM321" SOT23-5 837.819,215.138 r270 top
U13 "TP7660" SO-8 853.272,223.114 r180 top
U14 "TPS63000" QFN-10 857.553,210.869 r0 top
U15 "24LC128" 8s1 843.94,196.663 r180 top
U16 "INA213" SC70-6 848.69,241.833 r90 top
U17 "LM321" SOT23-5 828.853,227.101 r270 top
U18 "LM321" SOT23-5 844.144,215.392 r270 top
U19 "LM358D" 751-02 794.36,214.376 r180 top
U20 "INA213" SC70-6 850.316,242.748 r90 bottom
U22 "DS1337S" SO-8 827.71,190.424 r270 top
U23 "LM321" SOT23-5 834.085,227.127 r270 top
U25 "LM321" SOT23-5 839.368,227.254 r270 top
U26 "LM321" SOT23-5 844.677,227.076 r270 top
V "ND" END_1.5_2.8#1 854.608,247.65 r90 top
V_IN "ND" END_3_6#6 826.999,255.905 r90 top
VMNG "ND" END_3_6#7 852.322,210.795 r90 top locked (schematic designator VMNG_OUT)
Y1 "32.768kHz_SMD" XTAL-3216 821.69,190.246 r90 top
Y2 "8MHz_SMD" XTAL-P4mm_SMD 829.488,214.681 r90 top
Y3 "32.768kHz_SMD" XTAL-3216 815.594,228.346 r180 top

## Footprints (in the part's own frame and the unit in brackets; to place one, negate y for a bottom-side part, rotate by r counter-clockwise, add the part's x,y. Pads: shape width x height; smd on the part's side, far side on the other; paste and mask are expansions set on the pad)
8s1 [mm] "Small Outline; 8 Leads; Body Width 3.9 mm; Pitch 1.27 mm"
  rect 0.6x2.2 smd: 1(-1.905,-2.6) 2(-0.635,-2.6) 3(0.635,-2.6) 4(1.905,-2.6) 5(1.905,2.6) 6(0.635,2.6) 7(-0.635,2.6) 8(-1.905,2.6)
  silkscreen extent -2.88,-2.72 2.5,1.1
751-02 [mm] "Small Outline; 8 Leads; Body Width 3.9 mm; Pitch 1.27 mm"
  rect 0.6x2.2 smd: 1(-1.905,-2.6) 2(-0.635,-2.6) 3(0.635,-2.6) 4(1.905,-2.6) 5(1.905,2.6) 6(0.635,2.6) 7(-0.635,2.6) 8(-1.905,2.6)
  silkscreen extent -2.88,-2.72 2.5,1.1
BATT_BAK [mm]
  rect 2x0.8 smd: 1(6.147,0.668) 2(6.147,-0.821)
  silkscreen extent -2.74,-3.4 4.9,3.3
C1608-0603 [mm] "Chip Resistor; Body 1.6 x 0.8 mm (LxW typ)"
  rect 1.1x1 smd: 1(-0.85,0) 2(0.85,0)
  silkscreen extent -1.8,-0.9 1.8,0.9
CC3216-1206 [mm]
  rect 1.6x1.8 smd: 1(-2.54,0) 2(0.26,0)
  silkscreen extent -3.81,-1.27 1.52,1.27
CR6332-2512 [mm] "Chip Resistor; Body 6.3 x 3.2 mm (LxW typ)"
  rect 1.8x3.2 smd: 1(-2.8,0) 2(2.8,0)
  silkscreen extent -1.6,-1.5 1.6,1.5
END_1.5_2.8#1 [mm]
  round 2.8 hole 1.5: 1(0,0)
END_1.5_2.8#2 [mm]
  round 6 hole 3: 1(-0.05,-10.891)
END_3_6#1 [mm]
  round 6 hole 3: 1(-8.409,-0.196)
END_3_6#2 [mm]
  round 6 hole 3: 1(-8.005,3.974)
END_3_6#3 [mm]
  round 6 hole 3: 1(-1.336,-6.351)
END_3_6#4 [mm]
  round 6 hole 3: 1(-0.657,-2.101)
END_3_6#5 [mm]
  round 6 hole 3: 1(0.157,0.571)
END_3_6#6 [mm]
  round 6 hole 3: 1(-6.224,1.345)
END_3_6#7 [mm]
  round 6 hole 3: 1(-2.363,2.854)
HDR2X3 [mm] "Connector; Header; 3x2 Position"
  rect 1.5x1.5 hole 0.9: 1(0,0)
  round 1.5 hole 0.9: 2(0,2.54) 3(2.54,0) 4(2.54,2.54) 5(5.08,0) 6(5.08,2.54)
  silkscreen extent -1.27,-1.27 6.35,3.81
HDR2X10 [mm] "Connector; Header; 10x2 Position"
  rect 1.5x1.5 hole 0.9: 1(0,0)
  round 1.5 hole 0.9: 2(0,2.54) 3(2.54,0) 4(2.54,2.54) 5(5.08,0) 6(5.08,2.54) 7(7.62,0) 8(7.62,2.54) 9(10.16,0) 10(10.16,2.54) 11(12.7,0) 12(12.7,2.54) 13(15.24,0) 14(15.24,2.54) 15(17.78,0) 16(17.78,2.54) 17(20.32,0) 18(20.32,2.54) 19(22.86,0) 20(22.86,2.54)
  silkscreen extent -1.27,-1.27 24.13,3.81
L3x3x1.5_5A [mm]
  rect 1.5x2 smd: 1(0,-1.5) 2(3,-1.5)
  silkscreen extent 0.03,-3 3.03,0
LED0805 [mil]
  rect 60x50 smd: 1(49.55,-0.2) 2(-40.45,-0.2)
  silkscreen extent -90,-45 100,45
QFN-10 [mm]
  rect 1.6x2.5 smd: 0(1.5,1.5)
  rect 0.8x0.25 smd: 1(0,2.5) 2(0,2) 3(0,1.5) 4(0,1) 5(0,0.5) 6(3,0.5) 7(3,1) 8(3,1.5) 9(3,2) 10(3,2.5)
  silkscreen extent -0.68,0 3,3.55
QFP-64 [mil]
  rect 12x80 smd: 1(92,-482) 2(112,-482) 3(131,-482) 4(151,-482) 5(171,-482) 6(190,-482) 7(210,-482) 8(230,-482) 9(249,-482) 10(269,-482) 11(289,-482) 12(308,-482) 13(328,-482) 14(348,-482) 15(367,-482) 16(387,-482) 33(387,-1) 34(367,-1) 35(348,-1) 36(328,-1) 37(308,-1) 38(289,-1) 39(269,-1) 40(249,-1) 41(230,-1) 42(210,-1) 43(190,-1) 44(171,-1) 45(151,-1) 46(131,-1) 47(112,-1) 48(92,-1)
  rect 80x12 smd: 17(480,-388) 18(480,-368) 19(480,-349) 20(480,-329) 21(480,-309) 22(480,-290) 23(480,-270) 24(480,-250) 25(480,-231) 26(480,-211) 27(480,-191) 28(480,-172) 29(480,-152) 30(480,-132) 31(480,-113) 32(480,-93) 49(-1,-93) 50(-1,-113) 51(-1,-132) 52(-1,-152) 53(-1,-172) 54(-1,-191) 55(-1,-211) 56(-1,-231) 57(-1,-250) 58(-1,-270) 59(-1,-290) 60(-1,-309) 61(-1,-329) 62(-1,-349) 63(-1,-368) 64(-1,-388)
  silkscreen extent -1,-482 480,-1
SC70-6 [mm]
  rect 1x0.4 smd: 1(0,0) 2(0,-0.65) 3(0,-1.3) 4(2.2,-1.3) 5(2.2,-0.65) 6(2.2,0)
  silkscreen extent -0.3,-1.78 1.96,0.73
SO-8 [mm] "Plastic Small Outline; 8 Leads; Body Width 3.9 mm"
  rect 0.55x2.2 smd: 1(-1.905,-2.6) 2(-0.635,-2.6) 3(0.635,-2.6) 4(1.905,-2.6) 5(1.905,2.6) 6(0.635,2.6) 7(-0.635,2.6) 8(-1.905,2.6)
  silkscreen extent -2.85,-2.72 2.5,1.1
SO-G3/C2.5 [mm] "SOT-23; 3 Leads; Body 3.0 x 2.6 mm, inc. leads (LxW max)"
  rect 0.9x0.95 smd: 1(-1.001,-2.164) 2(0.899,-2.164) 3(-0.051,0.336)
  silkscreen extent -2.13,-2.29 1.25,0.34
SOT23-5 [mm]
  rect 1.8x0.6 smd: 1(-1.662,2.154) 2(-1.662,1.204) 3(-1.662,0.254) 4(1.386,0.254) 5(1.386,2.154)
  silkscreen extent -1.54,-0.22 1.26,2.63
XH-03H [mm] "XH Serial,2.54mm pitch"
  rect 1.5x1.5 hole 0.9: 1(0,0)
  round 1.5 hole 0.9: 2(2.54,0) 3(5.08,0)
  silkscreen extent -2.54,-2.54 7.62,2.54
XH-04H [mm] "XH Serial,2.54mm pitch"
  rect 1.5x1.5 hole 0.9: 1(0,0)
  round 1.5 hole 0.9: 2(2.54,0) 3(5.08,0) 4(7.62,0)
  silkscreen extent -2.54,-2.54 10.16,2.54
XTAL-3216 [mil] "XTAL SMD type, body=1.5x3.2mm"
  rect 60x98.43 smd: 1(0,0) 2(130,0)
  silkscreen extent 35,-45 95,45
XTAL-P4mm_SMD [mm] "XTAL,Pitch 4mm,SMD"
  rect 5x2 smd: 1(-2.794,-0.762) 2(5.715,-0.762)
  silkscreen extent -4.58,-2.81 7.63,1.54

## Part data
BT2: library part Battery, "Multicell Battery"
C1 C2 C3 C4 C5 C7 C8 C9 C10 C11 C12 C13 C14 C15 C16 C17 C18 C19 C20 C21 C22 C23 C24 C25 C26 C28 C29 C30 C31 C32 C33 C35 C37 C38 C39 C40: library part Cap2, "Capacitor"
C27: "Capacitor"
D1 D2 D5 D6: library part "D Schottky", "Schottky Diode"
D3: library part "D Tunnel1", "Tunnel Diode - RLC Model"
"G R T": "Header, 3-Pin"
P1: "Header, 4-Pin"
P2: "Header, 10-Pin, Dual row"
P3: "Header, 3-Pin, Dual row"
Q10 Q11: library part MOSFET-P
R1 R2 R3 R4 R5 R6 R7 R8 R9 R10 R11 R12 R13 R14 R15 R16 R17 R18 R19 R20 R21 R22 R23 R24 R25 R26 R27 R28 R29 R30 R31 R32 R33 R34 R36 R37 R38 R40 R41 R42 R43 R44 R45 R46 R47 R48 R49 R50 R51 R52 R53 R54 R67 R70 R71 R72 R73 R74 R75 R76 R77 R78 R87 R88 R89 R90 R91 R92 R93: library part Res3, "Resistor"
RxD2 TxD2 VMNG: library part COAX-F, "Coax-F Connector"
U1 U2 U3 U4 U5 U6 U8: library part TLP3107, "TLP3107"
U9: library part PCF8574T
U10: library part STC15F2K60S2_QFP44
U12: library part "Volt Reg", "Voltage Regulator"
U14: library part AP2004
U15: library part 24LC02, "IC"
U17: library part MC14052BF, "Dual 4-Channel Analog Multiplexer/Demultiplexer"
U18: library part LM358D, "Dual Low-Power Operational Amplifier"
U19: "Dual Low-Power Operational Amplifier"
U23: library part MC74HC4051AF, "Analog Multiplexer/Demultiplexer"
U25 U26: library part MCP6141, "MCP6141"
Y1 Y2 Y3: library part XTAL, "Crystal Oscillator"

## Via types
v1: diameter 0.6, hole 0.3, Top Layer to Bottom Layer, 246 vias

## Nets (pads, with @x,y where several pads share a name; then routed paths per layer and width w, separated by ;. In a path a pad name is that pad's centre, name@x,y a point inside that pad or via, vN(x,y) a via of type N, cw(c..) or ccw(c..) an arc to the next point about the centre after c; other vN are vias at no path point)
A_SEN: C15.2 R46.2 U10.59 U19.1 | length 29.7
  Top Layer w0.3: U19.1@796.265,216.976 R46.2@796.265,219.8 ; R46.2@796.315,219.851 C15.2@798.322,219.851 ; v1(816.585,220.015) 816.788,219.812 U10.59@820.75,219.812
  Bottom Layer w0.3: v1(797.357,219.851) 799.172,221.666 806.196,221.666 807.847,220.015 v1(816.585,220.015)
A_VB1: U9.1 U9.4 U10.6 | length 21.3
  Top Layer w0.3: v1(814.68,222.656) 815.111,223.088 815.467,223.088 815.899,223.52 U10.6@815.899,224.688 ; U9.4@823.849,225.716 823.849,226.848 824.205,227.203 v1(825.246,227.203) ; v1@825.259,227.19 825.749,227.681 U9.1@825.749,228.764
  Mid-Layer 1 w0.3: v1(814.68,222.656) 814.68,225.501 815.416,226.238 824.281,226.238 v1(825.246,227.203)
A_VB2: U10.5 U17.1 U17.4 | length 26.4
  Top Layer w0.3: v1(815.34,222.098) 816.381,223.139 U10.5@816.381,224.688 ; U17.4@829.107,225.716 829.107,226.822 829.488,227.203 830.529,227.203 831.007,227.681 U17.1@831.007,228.764
  Mid-Layer 1 w0.3: v1(815.34,222.098) 815.34,224.917 816,225.577 828.853,225.577 v1(830.478,227.203)
A_VB3: U10.4 U23.1 U23.4 | length 31.7
  Top Layer w0.3: v1(816.026,221.513) 816.889,222.377 U10.4@816.889,224.688 ; U23.4@834.34,225.741 834.34,226.822 834.695,227.178 835.762,227.178 836.24,227.656 U23.1@836.24,228.789
  Mid-Layer 1 w0.3: v1(816.026,221.513) 816.026,224.384 816.635,224.993 833.552,224.993 v1(835.736,227.178)
A_VB4: U10.3 U25.1 U25.4 | length 37.4
  Top Layer w0.3: v1(816.712,221.031) 817.397,221.717 U10.3@817.397,224.688 ; U25.4@839.623,225.868 839.623,227.178 839.826,227.381 841.248,227.381 841.523,227.656 U25.1@841.523,228.916
  Mid-Layer 1 w0.3: v1(816.712,221.031) 816.712,223.952 817.143,224.384 838.175,224.384 v1(841.172,227.381)
A_VB5: U10.2 U26.1 U26.4 | length 42.3
  Top Layer w0.3: v1(817.448,220.548) 817.88,220.98 U10.2@817.88,224.688 ; U26.4@844.931,225.69 844.931,226.848 845.236,227.152 846.506,227.152 846.831,227.478 U26.1@846.831,228.738
  Mid-Layer 1 w0.3: v1(817.448,220.548) 817.448,223.291 817.931,223.774 842.975,223.774 v1(846.43,227.228)
A_VCHG: U10.61 U12.1 U12.4 | length 25.9
  Top Layer w0.3: U10.61@820.75,220.802 822.274,220.802 v1(822.604,221.132) ; U12.4@838.073,213.752 838.073,214.808 838.505,215.24 v1(839.572,215.24) 839.973,215.641 U12.1@839.973,216.8
  Bottom Layer w0.3: v1(822.604,221.132) 827.557,221.132 833.45,215.24 v1(839.572,215.24)
A_VDIS: U10.60 U18.1 U18.4 | length 32.7
  Top Layer w0.3: U10.60@820.75,220.294 822.503,220.294 v1(822.63,220.167) ; U18.4@844.398,214.006 844.398,214.986 844.88,215.468 v1(846.023,215.468) 846.298,215.743 U18.1@846.298,217.054
  Bottom Layer w0.3: v1@822.655,220.193 827.43,220.193 833.323,214.3 844.855,214.3 v1(846.023,215.468)
CTRL_0: R70.2 U10.25 | length 27
  Top Layer w0.3: R70.2@794.588,234.1 795.821,232.867 799.668,232.867 800.557,231.978 800.557,220.777 803.021,218.313 U10.25@808.533,218.313
CTRL_1: R71.2 U10.24 | length 25.3
  Top Layer w0.3: R71.2@806.069,234.049 806.069,233.274 805.688,232.893 802.132,232.893 801.192,231.953 801.192,221.132 803.529,218.796 U10.24@808.533,218.796
CTRL_2: R72.2 U10.23 | length 32.8
  Top Layer w0.3: U10.23@808.533,219.304 803.935,219.304 801.802,221.437 801.802,231.648 802.472,232.318 814.384,232.318 R72.2@815.899,233.832
CTRL_3: R73.2 U10.22 | length 46.9
  Top Layer w0.3: U10.22@808.533,219.812 804.367,219.812 802.538,221.64 802.538,231.242 803.015,231.718 819.398,231.718 821.08,233.401 823.163,233.401 824.726,234.964 R73.2@831.494,234.964
CTRL_4: R74.2 U10.21 | length 20.1
  Top Layer w0.3: v1(803.25,230.226) 803.25,221.844 804.799,220.294 U10.21@808.533,220.294
  Bottom Layer w0.3: R74.2@800.583,234.151 800.583,232.893 800.938,232.537 802.284,232.537 803.25,231.572 v1(803.25,230.226)
CTRL_5: R75.2 U10.20 | length 24.6
  Top Layer w0.3: v1(803.961,230.835) 803.961,222.047 805.205,220.802 U10.20@808.533,220.802
  Bottom Layer w0.3: v1(803.961,230.835) 803.961,232.639 804.266,232.943 811.378,232.943 811.759,233.324 R75.2@811.759,234.176
CTRL_6: R76.2 U10.19 | length 31.9
  Top Layer w0.3: v1(804.723,230.251) 804.723,222.123 805.536,221.31 U10.19@808.533,221.31
  Bottom Layer w0.3: v1(804.723,230.251) 804.723,231.826 805.078,232.181 819.924,232.181 R76.2@821.817,234.075
CTRL_7: R77.2 U10.18 | length 46.1
  Top Layer w0.3: v1(805.459,230.835) 805.459,222.529 806.196,221.793 U10.18@808.533,221.793
  Bottom Layer w0.3: v1(805.459,230.835) 805.459,231.267 805.774,231.581 821.192,231.581 823.138,233.528 836.676,233.528 837.489,234.34 R77.2@837.489,235.065
CTRL_8: R27.2 U10.17 | length 48.1
  Top Layer w0.3: U10.17@808.533,222.301 806.679,222.301 806.094,222.885 806.094,230.53 806.653,231.089 819.633,231.089 821.309,232.766 823.417,232.766 824.611,233.959 841.285,233.959 R27.2@842.137,234.811
FLASH_CTRL: R51.2 U10.14 | length 46.4
  Top Layer w0.3: v1(811.632,222.479) 811.886,222.733 U10.14@811.886,224.688
  Mid-Layer 1 w0.3: v1(811.632,222.479) 811.632,225.654 812.749,226.771 821.004,226.771 822.884,228.651 846.811,228.651 v1(848.919,230.759)
  Bottom Layer w0.5: R51.2@848.919,229.272 v1(848.919,230.759)
FLASH_OUT: Q11.3 R53.1 S.1 | length 14.4
  Bottom Layer w0.5: R53.1@853.923,234.327 853.751,234.498 Q11.3@850.621,234.498 850.621,240.741 852.576,242.697 S.1@854.634,242.697
GND: "G R T.3" B1-.1 B2-.1 B3-.1 B4-.1 B5-.1 BT2.2 C1.1 C2.1 C4.2 C5.2 C7.1 C8.2 C9.2 C10.1 C11.2 C12.2 C13.1 C14.1 C16.2 C17.2 C18.2 C19.2 C20.2 C21.2 C22.2 C25.2 C26.2 C27.2 C28.2 C29.2 C30.2 C31.2 C32.2 C33.2 C35.2 C37.2 C38.2 C39.2 C40.2 D5.1 D6.1 G.1 GND.1 P1.3 P2.6 P2.19 P2.20 P3.5 Q1.2 Q2.2 Q3.2 Q4.2 Q5.2 Q6.2 Q7.2 Q8.2 Q9.2 R15.2 R25.1 R28.1 R31.1 R32.2 R33.1 R37.1 R41.1 R45.1 R50.1 R52.1 R53.2 R54.1 R78.2 R87.2 R88.2 R89.2 R90.2 R91.2 R92.2 R93.2 S-.1 U10.62 U10.63 U13.1 U13.3 U13.6 U14.0 U14.3 U14.7 U14.9 U15.1 U15.2 U15.3 U15.4 U15.7 U16.1 U16.2 U20.1 U20.2 U22.4 | length 167.5
  Top Layer w0.25: U14.3@857.553,212.369 U14.0@859.053,212.369 ; U14.0@859.112,211.869 U14.7@860.553,211.869 ; U14.0@859.147,212.869 U14.9@860.553,212.869
  Top Layer w0.3: C16.2@790.448,211.596 v1(789.063,211.596) 789.063,214.82 789.7,215.456 C19.2@790.448,215.456 ; R78.2@796.62,234.1 Q1.2@798.264,234.1 ; C20.2@798.463,213.688 R45.1@798.463,215.798 ; R87.2@808.152,234.049 Q2.2@809.824,234.049 ; C14.1@817.474,228.942 C12.2@821.487,228.942 ; R88.2@817.905,233.832 Q3.2@819.68,233.832 ; U10.62@820.75,221.31 821.792,221.31 822.071,221.59 822.071,221.818 ; U10.63@820.75,221.793 822.046,221.793 v1(822.503,221.971) ; v1(823.519,188.519) U22.4@825.11,188.519 ; 826.084,221.576 826.084,222.326 v1(826.541,222.783) ; v1(826.502,231.941) C26.2@826.502,230.81 827.456,229.856 C18.2@827.456,228.358 ; v1@831.735,231.888 C31.2@831.735,230.835 832.663,229.907 C29.2@832.663,228.332 ; C27.2@832.866,190.768 837.299,190.768 838.284,191.753 BT2.2@838.284,197.036 ; R89.2@833.577,235.014 Q4.2@835.326,235.014 ; C10.1@833.907,215.328 C7.1@833.907,217.539 ; v1(836.967,231.914) C35.2@836.967,230.861 837.921,229.907 C33.2@837.921,228.459 ; C28.2@840.726,219.024 841.705,218.045 C25.2@841.705,215.912 ; v1@842.225,232.093 C38.2@842.225,230.962 843.178,230.009 C37.2@843.178,228.459 ; U15.3@843.305,199.263 v1(843.305,200.914) ; 844.22,233.909 R32.2@844.22,234.837 Q9.2@845.994,234.837 ; C32.2@847.076,219.304 v1(848.131,218.249) C30.2@848.131,216.242 ; v1(847.584,231.99) C40.2@847.584,230.784 848.512,229.856 C39.2@848.512,228.485 ; U16.1@848.69,241.833 848.69,241.198 848.97,240.919 849.224,240.919 849.34,241.036 U16.2@849.34,241.833
  Top Layer w0.5: P1.3@790.524,233.299 794.233,229.591 C21.2@795.344,229.591 C17.2@795.344,226.339 ; v1(808.457,230.302) 810.158,230.302 810.412,230.048 C13.1@810.412,229.069 ; D5.1@815.233,197.347 R50.1@817.869,197.347 ; C28.2@840.726,219.024 v1(840.726,220.408) ; U15.4@842.035,199.263 U15.1@845.845,199.263 845.845,198.161 846.367,197.64 C9.2@847.827,197.64 ; U15.7@844.575,194.063 U15.2@844.575,199.263 ; v1(849.097,240.919) 850.075,239.94 C1.1@850.075,239.42 ; 852.637,223.622 853.116,223.623 854.132,223.625 v1(855.148,223.628) 855.177,223.657 U13.1@855.177,225.714 ; U13.3@852.637,225.714 852.637,218.487 C4.2@853.522,217.602
  Bottom Layer w0.3: Q5.2@796.676,234.089 798.489,234.089 R90.2@798.551,234.151 ; Q6.2@808.106,233.911 809.512,233.911 R91.2@809.752,234.151 ; Q7.2@817.911,233.733 819.469,233.733 R92.2@819.76,234.024 ; R25.1@823.747,228.942 825.207,228.942 826.502,230.237 v1(826.502,231.941) ; R31.1@829.462,229.132 830.731,229.132 831.748,230.149 v1(831.748,231.902) ; Q8.2@833.684,234.876 835.243,234.876 R93.2@835.406,235.04 ; R37.1@834.695,229.221 836.104,229.221 836.967,230.085 v1(836.967,231.914) ; R28.1@837.971,218.731 v1(837.971,221.59) ; R41.1@839.927,229.374 841.26,229.374 842.213,230.327 v1(842.213,232.105) ; R33.1@844.144,218.833 v1(844.144,220.904) ; R54.1@845.185,229.386 846.961,229.386 847.584,230.009 v1(847.584,231.99) ; C2.1@847.039,241.898 848.018,240.919 849.3,240.919 849.666,241.285 U20.2@849.666,242.748 ; 849.666,241.783 850.113,241.783 850.316,241.986 U20.1@850.316,242.748
  Bottom Layer w0.5: 846.125,236.525 846.125,236.818 ; D6.1@853.708,227.589 853.708,232.412 R53.2@853.923,232.627
  other v1: 817.982,184.328 818.998,184.328 820.014,184.328 821.03,184.328 814.934,184.379 815.95,184.379 816.966,184.379 817.982,185.344 818.998,185.344 820.014,185.344 821.03,185.344 814.934,185.395 815.95,185.395 816.966,185.395 817.982,186.36 818.998,186.36 820.014,186.36 821.03,186.36 814.934,186.411 815.95,186.411 816.966,186.411 834.111,190.768 816.585,197.347 856.513,197.79 857.529,197.79 856.513,198.806 857.529,198.806 844.474,200.889 845.49,200.889 846.506,200.889 842.264,200.939 859.536,202.032 853.923,202.717 854.939,202.717 855.955,202.717 856.971,202.717 850.875,202.768 851.891,202.768 852.907,202.768 859.536,203.048 853.923,203.733 854.939,203.733 855.955,203.733 856.971,203.733 850.875,203.784 851.891,203.784 852.907,203.784 859.536,204.064 860.552,204.064 859.536,205.08 860.552,205.08 843.128,205.207 844.144,205.207 845.16,205.207 843.128,206.223 844.144,206.223 845.16,206.223 843.128,207.239 844.144,207.239 845.16,207.239 789.102,207.594 790.118,207.594 791.134,207.594 843.128,208.255 844.144,208.255 845.16,208.255 789.102,208.61 790.118,208.61 791.134,208.61 801.573,213.081 802.589,213.081 803.605,213.081 796.392,213.97 795.198,213.995 801.573,214.097 802.589,214.097 803.605,214.097 798.463,214.554 801.573,215.113 802.589,215.113 803.605,215.113 801.624,216.129 802.64,216.129 803.656,216.129 833.907,216.484 801.624,217.145 802.64,217.145 803.656,217.145 856.488,221.894 856.488,222.91 853.116,223.628 854.132,223.628 856.488,223.926 861.771,227.533 862.787,227.533 863.803,227.533 861.771,228.549 862.787,228.549 863.803,228.549 818.464,228.942 820.471,228.942 861.771,229.565 862.787,229.565 863.803,229.565 861.771,230.581 862.787,230.581 863.803,230.581 861.822,231.597 862.838,231.597 863.854,231.597 861.822,232.613 862.838,232.613 863.854,232.613 861.822,233.629 862.838,233.629 863.854,233.629 818.82,233.807 809.041,234.01 797.484,234.1 845.236,234.837 834.568,235.001
GPRS_PWR_EN: EN.1 U10.39 | length 55.4
  Top Layer w0.3: U10.39@813.892,212.471 813.892,214.757 v1(814.375,215.24)
  Mid-Layer 1 w0.3: v1(814.375,215.24) 837.26,215.24 838.327,216.306 858.028,216.306 EN.1@863.903,222.181
GPS_PWR_EN: EN2.1 U10.40 | length 58.1
  Top Layer w0.3: U10.40@814.4,212.471 814.4,213.995 v1(814.73,214.325)
  Mid-Layer 1 w0.3: v1(814.73,214.325) 839.546,214.325 840.283,213.589 840.283,196.113 841.262,195.135 EN2.1@852.7,195.135
IIC0_SCL: R38.1 U10.37 U15.6 U22.6 | length 57.5
  Top Layer w0.3: U10.37@812.902,212.471 812.902,210.82 v1(813.13,210.591) ; v1(828.726,189.789) U22.6@830.31,189.789 ; v1(841.68,190.627) 842.254,191.202 R38.1@843.624,191.202 843.624,192.01 843.305,192.329 U15.6@843.305,194.081
  Bottom Layer w0.3: v1(813.13,210.591) 824.687,210.591 825.576,209.702 825.576,190.551 826.338,189.789 840.842,189.789 v1(841.68,190.627)
IIC0_SDA: R67.1 U10.36 U15.5 U22.5 | length 59.8
  Top Layer w0.3: v1(812.394,210.287) U10.36@812.394,212.471 ; v1(828.751,188.519) U22.5@830.31,188.519 ; v1(842.035,192.176) U15.5@842.035,194.063 ; v1(842.442,189.128) R67.1@843.624,189.128
  Bottom Layer w0.3: v1(812.394,210.287) 812.876,209.804 822.579,209.804 823.036,209.347 823.036,203.708 824.789,201.955 824.789,189.713 825.983,188.519 841.832,188.519 v1(842.442,189.128) 842.442,191.77 v1(842.035,192.176)
LED_CTRL: P2.5 Q10.3 | length 8.2
  Top Layer w1: P2.5@819.252,204.673 819.252,203.911 822.432,200.731 Q10.3@822.432,197.828
LED_PWR_EN: R47.1 U10.41 | length 17.1
  Top Layer w0.3: R47.1@812.825,198.083 811.643,198.083 811.403,198.323 811.403,201.092 812.673,202.362 812.673,207.975 814.883,210.185 U10.41@814.883,212.471
MCU_RXD: "G R T.2" RxD.1 U10.33 | length 34.6
  Top Layer w0.3: 795.071,203.911 795.426,203.556 809.473,203.556 810.895,204.978 U10.33@810.895,212.471
  Bottom Layer w0.3: 795.071,203.911 800.532,203.911 801.837,205.217 RxD.1@801.837,208.432
MCU_RXD2_2: RxD2.1 U10.35 | length 33.1
  Top Layer w0.3: v1(811.174,220.955) 811.886,220.243 U10.35@811.886,212.471
  Bottom Layer w0.3: RxD2.1@787.403,222.181 787.497,222.275 806.501,222.275 807.822,220.955 v1(811.174,220.955)